# Altium PCB PCB_B.PcbDoc
Units mm, origin at the board's own origin, x right, y up, seen from the top; angles counter-clockwise.
Board outline 200 x 100 mm, 2 copper layers (Top Layer, Bottom Layer), stack 2.071 mm thick; 53 components, 0 nets, 135 pads, 0 vias.
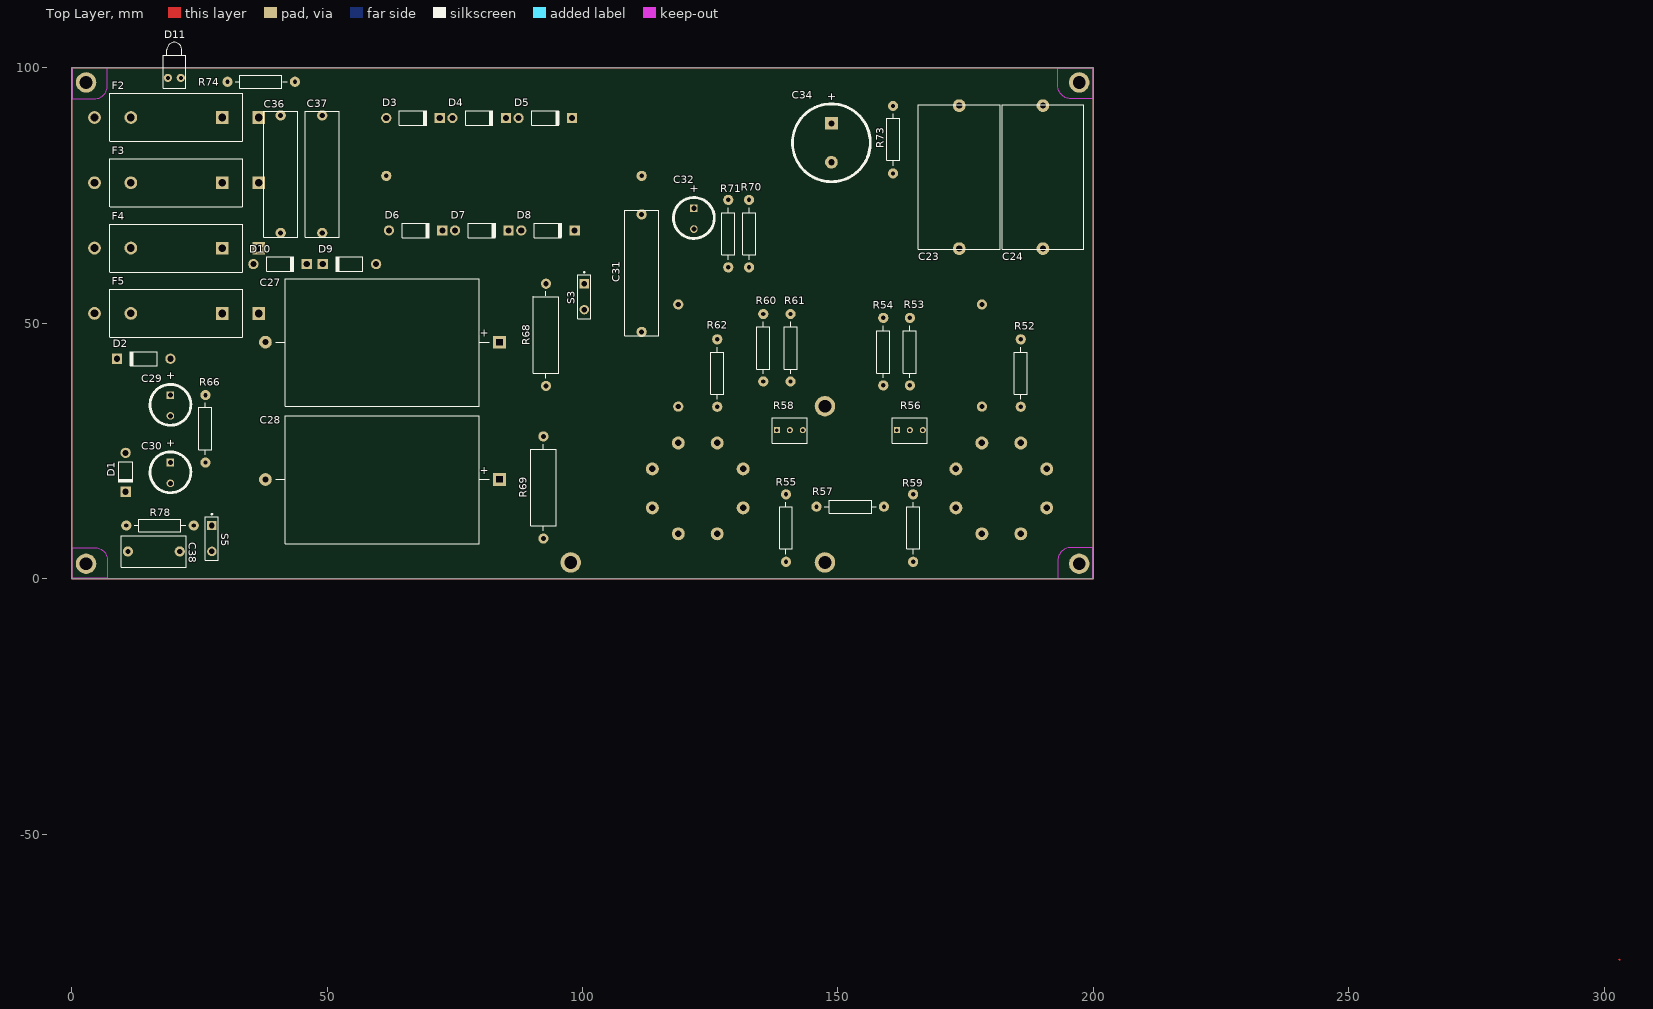
[diagram p0: Top Layer view]
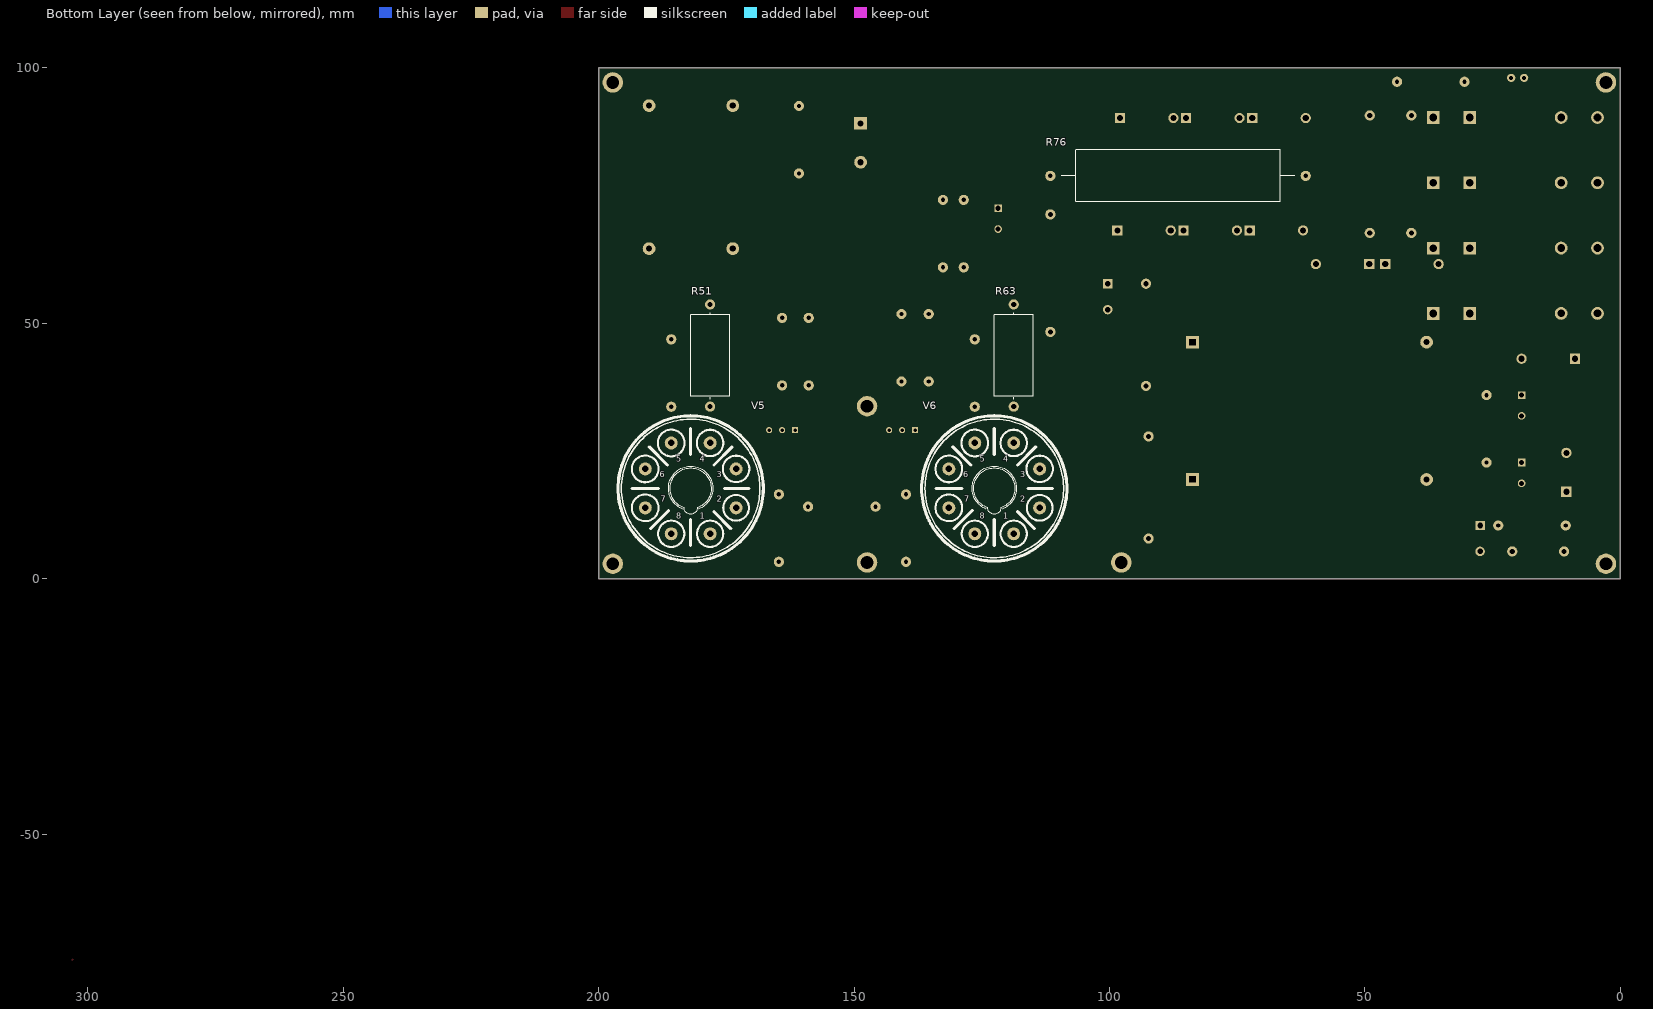
[diagram p1: Bottom Layer view, seen from below]

## Layer stack, top to bottom
Top Solder: solder mask 0.0102, Solder Resist, Dk 3.5
Top Layer: signal copper 0.0356
Dielectric 1: dielectric 2, FR-4, Dk 4.8
Bottom Layer: signal copper 0.0356
Bottom Solder: solder mask 0.0102, Solder Resist, Dk 3.5

## Board outline
0,0 200,0 200,100 0,100

## Design rules (kind name [scope] priority, off if disabled: settings)
Clearance [All] p1: gap=0.254
Height [All] p1: minheight=0 maxheight=35 prefheight=12.7
PolygonConnect [All] p1: connectstyle=Relief reliefconductorwidth=0.254 reliefentries=4 polygonreliefangle="90 Angle" airgapwidth=0.254
RoutingVias [All] p1: holewidth=0.711 width=1.27 viastyle="Through Hole" minholewidth=0.711 minwidth=1.27 maxholewidth=0.711 maxwidth=1.27
SolderMaskExpansion [All] p1: expansion=0.102
Width [All] p1: maxlimit=0.254 minlimit=0.254 preferedwidth=0.254
28 further rules are at their usual default settings.

## Components (designator, comment, footprint, x,y, rotation, side; value= is the part's Value field where it differs from the comment)
C23 "Orange Drop Capacitor" ORANGE-DROP-100nF-600V 173.736,83.614 r90 top
C24 "Orange Drop Capacitor" ORANGE-DROP-100nF-600V 190.119,83.614 r90 top
C27 "Cap FT Eletrolitic 100uF Axial 350V" "FT Eletrolitic 100uF Axial" 60.757,46.308 r180 top
C28 "Cap FT Eletrolitic 100uF Axial 350V" "FT Eletrolitic 100uF Axial" 60.757,19.431 r180 top
C29 "Cap Pol Radial Vishay 22uF 100V" RAD-POL-16x20x7.5 19.304,34.036 r90 top
C30 "Cap Pol Radial Vishay 22uF 100V" RAD-POL-16x20x7.5 19.304,20.828 r90 top
C31 "Orange Drop Capacitor" CAP-XICON-100nF-630V 111.572,59.817 r90 top
C32 "Cap Pol Radial Vishay 22uF 100V" RAD-POL-16x20x7.5 121.793,70.612 r90 top
C34 "Cap Pol Rad" RAD-POL-7.6-15 148.717,85.344 r90 top
C36 "Orange Drop Capacitor" CAP-XICON-100nF-630V 40.894,79.189 r270 top
C37 "Orange Drop Capacitor" CAP-XICON-100nF-630V 49.022,79.189 r270 top
C38 "Orange Drop Capacitor" RAD-0.4 16.053,5.334 r180 top
D1 "D Zener" "ZENER 1W 100V" 10.541,20.828 r270 top
D2 "Diode 1N4007" DO-41 14.074,43.053 r180 top
D3 "Diode 1N4007" "1N4007-10.46mm Diode" 66.802,90.189 r0 top
D4 "Diode 1N4007" "1N4007-10.46mm Diode" 79.756,90.189 r0 top
D5 "Diode 1N4007" "1N4007-10.46mm Diode" 92.71,90.189 r0 top
D6 "Diode 1N4007" "1N4007-10.46mm Diode" 67.31,68.189 r0 top
D7 "Diode 1N4007" "1N4007-10.46mm Diode" 80.264,68.189 r0 top
D8 "Diode 1N4007" "1N4007-10.46mm Diode" 93.218,68.189 r0 top
D9 "Diode 1N4007" "1N4007-10.46mm Diode" 54.356,61.595 r180 top
D10 "Diode 1N4007" "1N4007-10.46mm Diode" 40.767,61.595 r0 top
D11 "POWER LED" LED-1 20.066,98.044 r90 top
F2 "750ma" FUSE-PCB-6x31 20.447,90.297 r180 top
F3 "750ma" FUSE-PCB-6x31 20.447,77.512 r180 top
F4 "6A" FUSE-PCB-6x31 20.447,64.728 r180 top
F5 "6A" FUSE-PCB-6x31 20.447,51.943 r180 top
R51 "Wire Wound Power Resistor" "Resistor Vishay 5W 1k Power Wirewound" 178.176,43.688 r90 bottom
R52 "Metal Film Resistor 1/2W" AXIAL-0.6 185.796,40.259 r90 top
R53 "Metal Film Resistor 1/2W" AXIAL-0.6 164.084,44.45 r90 top
R54 "Metal Film Resistor 1/2W" AXIAL-0.6 158.877,44.45 r90 top
R55 "Metal Film Resistor 1/2W" AXIAL-0.6 139.827,9.906 r270 top
R56 "3362U trimpot" "33262U trimpot" 164.084,29.083 r0 top
R57 "Metal Film Resistor 1/2W" AXIAL-0.6 152.4,14.097 r180 top
R58 "3362U trimpot" "33262U trimpot" 140.589,29.083 r0 top
R59 "Metal Film Resistor 1/2W" AXIAL-0.6 164.719,9.906 r270 top
R60 "Metal Film Resistor 1/2W" AXIAL-0.6 135.382,45.212 r90 top
R61 "Metal Film Resistor 1/2W" AXIAL-0.6 140.716,45.212 r90 top
R62 "Metal Film Resistor 1/2W" AXIAL-0.6 126.356,40.259 r90 top
R63 "Wire Wound Power Resistor" "Resistor Vishay 5W 1k Power Wirewound" 118.736,43.688 r90 bottom
R66 "Metal Film Resistor 1W" AXIAL-0.6 26.162,29.337 r270 top
R68 "Metal Film Resistor 1W" RESISTOR-MetalOxide-3W 92.837,47.752 r90 top
R69 "Metal Film Resistor 1W" RESISTOR-MetalOxide-3W 92.329,17.86 r90 top
R70 "Metal Film Resistor 1W" AXIAL-0.6 132.588,67.564 r90 top
R71 "Metal Film Resistor 1W" AXIAL-0.6 128.524,67.564 r90 top
R73 "Metal Film Resistor 1W" AXIAL-0.6 160.782,85.946 r270 top
R74 "Metal Film Resistor 1/2W" AXIAL-0.6 37.084,97.282 r0 top
R76 "Wire Wound Power Resistor" "Power Wirewound Resistor 10W - Vishay Dale" 86.572,78.867 r180 bottom
R78 "Metal Film Resistor 1W" AXIAL-0.6 17.272,10.414 r0 top
S3 "STAND-BY" SPST-2 100.33,55.212 r270 top
S5 "STAND-BY" SPST-2 27.432,7.874 r270 top
V5 "EL34-P" OKTAL 181.986,17.678 r180 bottom
V6 "EL34-P" OKTAL 122.546,17.678 r180 bottom

## Footprints (in the part's own frame and the unit in brackets; to place one, negate y for a bottom-side part, rotate by r counter-clockwise, add the part's x,y. Pads: shape width x height; smd on the part's side, far side on the other; paste and mask are expansions set on the pad)
"1N4007-10.46mm Diode" [mm] "Diode, Axial; Body 5.2 x 2.7 mm (LxDia. max), Lead Dia. 0.86 mm (max)"
  round 2 hole 1.2: 1(-5.23,0)
  rect 2x2 hole 1.2: 2(5.23,0)
  silkscreen extent -2.65,-1.4 2.75,1.4, body extent -5.63,-1.31 5.63,1.31, height 3.31
"33262U trimpot" [mm] "Thru-Hole; 3 Leads"
  rect 1.2x1.2 hole 0.7: 1(-2.54,0)
  round 1.2 hole 0.7: 2(0,0) 3(2.54,0)
  silkscreen extent -3.43,-2.54 3.43,2.41, body extent -3.3,-3.75 3.3,3.3, height 4.75
AXIAL-0.6 [mm] "Axial Device, Thru-Hole; 2 Leads; 0.6 in Pin Spacing"
  round 2 hole 0.85: 1(-6.604,0) 2(6.604,0)
  silkscreen extent -5.08,-1.27 5.08,1.27, body extent -6.85,-1.5 6.94,1.5, height 3.5
CAP-XICON-100nF-630V [mm] "Radial Cap, Thru-Hole; 2 Leads; 0.4 in Pin Spacing"
  round 2 hole 1: 1(-11.5,0) 2(11.5,0)
  silkscreen extent -12.3,-3.3 12.3,3.3, body extent -12,-2.92 11.75,2.83, height 10.92
DO-41 [mm] "Diode, Axial; Body 5.2 x 2.7 mm (LxDia. max), Lead Dia. 0.86 mm (max)"
  round 2 hole 1.2: 1(-5.23,0)
  rect 2x2 hole 1.2: 2(5.23,0)
  silkscreen extent -2.65,-1.4 2.75,1.4
"FT Eletrolitic 100uF Axial" [mm] "FT Axial Eletrolitic Capacitor Thru-Hole; 2 Leads; 45.0mm Pin Spacing"
  rect 2.5x2.5 hole 1.2 square: 1(-22.987,0)
  round 2.5 hole 1.2: 2(22.86,0)
  silkscreen extent -20.96,-12.45 20.83,12.57, body extent -23.14,-12.5 23.14,12.5, height 27.6
FUSE-PCB-6x31 [mm] "Thru-Hole; 2 Leads"
  rect 2.5x2.5 hole 1.5: 1(-16.129,0.017) 1(-9.017,0.017)
  round 2.5 hole 1.5: 2(8.888,0) 2(16,0)
  silkscreen extent -13,-4.7 13,4.7, body extent -16.13,-3.45 16,3.46, height 11.67
LED-1 [mm] "LED; 2 Leads"
  round 1.6 hole 0.8: 1(0,1.27) 2(0,-1.27)
  silkscreen extent -2,-2.2 6.95,2.2
OKTAL [mm]
  round 2.54 hole 1.27: 1(3.81,-8.89) 2(8.89,-3.81) 3(8.89,3.81) 4(3.81,8.89) 5(-3.81,8.89) 6(-8.89,3.81) 7(-8.89,-3.81) 8(-3.81,-8.89)
  silkscreen extent -14.22,-14.22 14.22,14.22, body extent -14.7,-14.7 14.7,14.7, height 16.7
ORANGE-DROP-100nF-600V [mm] "Orange Drop Capacitor 100nF WxLxH=28x16x25 mm"
  round 2.5 hole 1.2: 1(-19,0) 2(9,0)
  silkscreen extent -19.13,-8 9.14,8, body extent -19.01,-8 9,8, height 21
"Power Wirewound Resistor 10W - Vishay Dale" [mm] "Axial Device, Thru-Hole; 2 Leads; 50mm Pin Spacing"
  round 2 hole 0.85: 1(-25,0) 2(25,0)
  silkscreen extent -22.86,-5.08 22.86,5.08, body extent -25.4,-4.77 25.4,4.83, height 12.3
RAD-0.4 [mm] "Radial Cap, Thru-Hole; 2 Leads; 0.4 in Pin Spacing"
  round 2 hole 1: 1(-5.08,0) 2(5.08,0)
  silkscreen extent -6.35,-3.05 6.35,3.05
RAD-POL-7.6-15 [mm] "Polarized Capacitor (Radial); 2 Leads"
  rect 2.5x2.5 hole 1.2: 1(3.81,0)
  round 2.5 hole 1.2: 2(-3.81,0)
  silkscreen extent -7.62,-7.62 7.62,7.62, body extent -8.18,-8.22 8.25,8.22, height 27
RAD-POL-16x20x7.5 [mm] "Vishay 22uF 100V Polarized Capacitor (Radial); 2 Leads"
  rect 1.5x1.5 hole 1: 1(1.905,0)
  round 1.5 hole 1: 2(-2.159,0)
  silkscreen extent -4,-4 4,4, body extent -4,-3.99 4,3.99, height 13
"Resistor Vishay 5W 1k Power Wirewound" [mm] "Axial Device, Thru-Hole; 2 Leads; 1.0 in Pin Spacing"
  round 2 hole 1: 1(-10,0) 2(10,0)
  silkscreen extent -8.51,-3.81 8.38,3.81, body extent -10.4,-3.75 10.4,3.75, height 9.5
RESISTOR-MetalOxide-3W [mm] "Axial Device, Thru-Hole; 2 Leads; 0.6 in Pin Spacing"
  round 2 hole 1: 1(-10,0) 2(10,0)
  silkscreen extent -8.51,-2.5 8.51,2.5, body extent -11.1,-3.3 11.1,3.3, height 8.3
SPST-2 [mm] "Switch; 2 Leads"
  rect 1.85x1.85 hole 1.1: 1(-2.54,0)
  round 1.85 hole 1.1: 2(2.54,0)
  silkscreen extent -4.89,-1.27 4.28,1.27
"ZENER 1W 100V" [mm] "Zenner Diode - Brand Pending"
  round 2 hole 1.2: 1(-3.81,0)
  rect 2x2 hole 1.2: 2(3.81,0)
  silkscreen extent -2.03,-1.4 2,1.4, body extent -4.2,-1.33 4.2,1.33, height 3.33

## Part data
C23 C24: library part Cap-Orange-DROP_600V, "Capacitor"
C27 C28: "FT Eletrolitic Polarized Capacitor Axial 100uF"
C29 C30 C32: "Vishay 22uF 100V Polarized Capacitor (Radial); 2 Leads"
C31 C36 C37 C38: library part Cap-XICON-100nF-630V, "Capacitor XICON (WINE COVER) Polypropilene CAP 630V"
C34: "Polarized Capacitor (Axial)"
D1: "Zener Diode"
D2 D3 D4 D5 D6 D7 D8 D9 D10: "1 Amp General Purpose Rectifier"
D11: library part LED1, "Typical RED GaAs LED"
F2 F3 F4 F5: library part "Fuse 2", "Fuse"
R51 R63: library part "Res Wire Wound Power Resistor 5W", "Semiconductor Resistor"
R52 R53 R54 R55 R57 R59 R60 R61 R62 R74: library part "Res Metal Film 1/2W", "Semiconductor Resistor"
R56 R58: "3362U Timpot"
R66 R68 R69 R70 R71 R73 R78: library part "Res Wire Wound 1W", "Semiconductor Resistor"
R76: library part "Res Vishay Dale Wire Wound Power Resistor 10R 10W", "Semiconductor Resistor"
S3 S5: library part SW-SPST, "Single-Pole, Single-Throw Switch"

## Free pads (board coordinates)
  round 4 hole 2.5: 0(2.794,2.921) 0(2.794,97.155) 0(97.663,3.175) 0(147.447,3.175) 0(147.447,33.782) 0(197.231,2.921) 0(197.231,97.155)

## Nets (pads, with @x,y where several pads share a name; then routed paths per layer and width w, separated by ;. In a path a pad name is that pad's centre, name@x,y a point inside that pad or via, vN(x,y) a via of type N, cw(c..) or ccw(c..) an arc to the next point about the centre after c; other vN are vias at no path point)
pads on no net: C23.1 C23.2 C24.1 C24.2 C27.1 C27.2 C28.1 C28.2 C29.1 C29.2 C30.1 C30.2 C31.1 C31.2 C32.1 C32.2 C34.1 C34.2 C36.1 C36.2 C37.1 C37.2 C38.1 C38.2 D1.1 D1.2 D2.1 D2.2 D3.1 D3.2 D4.1 D4.2 D5.1 D5.2 D6.1 D6.2 D7.1 D7.2 D8.1 D8.2 D9.1 D9.2 D10.1 D10.2 D11.1 D11.2 F2.1 F2.2 F3.1 F3.2 F4.1 F4.2 F5.1 F5.2 R51.1 R51.2 R52.1 R52.2 R53.1 R53.2 R54.1 R54.2 R55.1 R55.2 R56.1 R56.2 R56.3 R57.1 R57.2 R58.1 R58.2 R58.3 R59.1 R59.2 R60.1 R60.2 R61.1 R61.2 R62.1 R62.2 R63.1 R63.2 R66.1 R66.2 R68.1 R68.2 R69.1 R69.2 R70.1 R70.2 R71.1 R71.2 R73.1 R73.2 R74.1 R74.2 R76.1 R76.2 R78.1 R78.2 S3.1 S3.2 S5.1 S5.2 V5.1 V5.2 V5.3 V5.4 V5.5 V5.6 V5.7 V5.8 V6.1 V6.2 V6.3 V6.4 V6.5 V6.6 V6.7 V6.8
copper on no net: | length 600.4
  Top Layer w0.254: 302.895,-74.473 303.149,-74.727 ; 0,0 200,0 200,100 0,100 0,0

## Keep-outs
Top Layer:
  region: 199.898,93.98 195.58,93.98 cw(c195.58,96.52) 193.04,96.52 193.04,100 199.898,100
  region: 199.898,6.096 195.58,6.096 ccw(c195.58,3.556) 193.04,3.556 193.04,0.076 199.898,0.076
  region: 0.127,6.096 4.445,6.096 cw(c4.445,3.556) 6.985,3.556 6.985,0.076 0.127,0.076
  region: 0.127,93.98 4.445,93.98 ccw(c4.445,96.52) 6.985,96.52 6.985,100 0.127,100

## Text inside footprints (layer, text, board x,y; h text height)
C27: Top Overlay "+" at 81.585,48.721 h1.52 r180
C28: Top Overlay "+" at 81.585,21.844 h1.52 r180
C29: Top Overlay "+" at 20.066,38.862 h1.5 r90
C30: Top Overlay "+" at 20.066,25.654 h1.5 r90
C32: Top Overlay "+" at 122.555,75.438 h1.5 r90
C34: Top Overlay "+" at 149.454,93.476 h1.5 r90
V5: Bottom Overlay "8" at 184.78,11.328 h1.97; Bottom Overlay "7" at 187.828,14.63 h1.97; Bottom Overlay "6" at 188.082,19.456 h1.97; Bottom Overlay "5" at 184.78,22.504 h1.97; Bottom Overlay "4" at 180.208,22.504 h1.97; Bottom Overlay "3" at 176.906,19.456 h1.97; Bottom Overlay "2" at 176.906,14.63 h1.97; Bottom Overlay "1" at 180.208,11.328 h1.97
V6: Bottom Overlay "8" at 125.34,11.328 h1.97; Bottom Overlay "7" at 128.388,14.63 h1.97; Bottom Overlay "6" at 128.642,19.456 h1.97; Bottom Overlay "5" at 125.34,22.504 h1.97; Bottom Overlay "4" at 120.768,22.504 h1.97; Bottom Overlay "3" at 117.466,19.456 h1.97; Bottom Overlay "2" at 117.466,14.63 h1.97; Bottom Overlay "1" at 120.768,11.328 h1.97